# EAGLE board UTN-Clase-Electronica02_003-CottierSolange-C3 (EAGLE 9.7.0)

Size 101.22 x 87.79 mm. Coordinates in mm from the lower left corner, seen from the top.
Outline: 0,0 101.22,0 101.22,87.78 0,87.78 0,0
Copper layers (1*16): Top 0.035mm / dielectric 1.5mm / Bottom 0.035mm
Design rules "default": minimum track width 6mil, minimum drill 0.35mm, track to track 6mil, track to pad 6mil, pad to pad 6mil, via to via 6mil, smd to smd 6mil, copper to edge 40mil, drill to drill 6mil, minimum pad ring 10mil, minimum via ring 8mil, stop-mask expansion 4mil, vias tented up to drill 0mil, thermal gap 10mil

## Footprints (pad centres in the part's own frame; a part is rotated, then mirrored left to right if it is on the bottom)
BATTERY-GENERIC = drill 1.118 pad 3.15 octagon: + 2.54,0; - -2.54,0
LEDRD254W60D565H860B = drill 0.981 pad 1.581: 1 -1.27,0; 2 1.27,0
1X02 = drill 1.016 long: 1 -1.27,0; 2 1.27,0
RESAD1016W63L850D250B = drill 0.83 pad 1.43: 1 -5.08,0; 2 5.08,0
GL5528 = drill 0.8 pad 1.4: 1 -1.702,0; 2 1.702,0
SWITCH-SPDT-PTH-8.5X3.7MM = drill 1.016 pad 1.88: 1 -2.54,0; 2 0,0; 3 2.54,0
SWITCH-MOMENTARY-PTH-6.5MM = drill 1.016 pad 1.88: 1 -3.251,2.261; 2 3.251,2.261; 3 -3.251,-2.261; 4 3.251,-2.261

## Placement (x,y rotation side)
BAT1  9V  [BATTERY-GENERIC]  27.25,8.26 180 top
D1  RED  [LEDRD254W60D565H860B]  44.14,71.5 90 top
L1  LIGHTBULB  [1X02]  5.79,53.89 0 top
R1  1k  [RESAD1016W63L850D250B]  59.8,42.15 270 top
R2  PHOTOCELL_GL5528  [GL5528]  94.24,82.07 270 top
S1  TOGGLE  [SWITCH-SPDT-PTH-8.5X3.7MM]  80.93,55.07 270 top
S2  SWITCH_MOMENTARY  [SWITCH-MOMENTARY-PTH-6.5MM]  8.92,37.46 90 top

## Library data of the parts
BAT1 L1 R1 R2 S1 S2 = Tinkercad
D1 = Tinkercad; CATEGORY: Opto-Electronic; SUB-CATEGORY: LED; VALUE: LED_RED

## Nets
BAT1+: BAT1.+ R1.2 R2.2 S2.1
BAT1-: BAT1.- D1.2 L1.2
S1_O: R2.1 S1.1
S1_P: D1.1 S1.2
S1_S: R1.1 S1.3
S2_3: L1.1 S2.3

## Tracks (layer width: path | path; a pad name or v marks a point on that pad's centre or on a via)
BAT1+  (3 unrouted)
BAT1-  (2 unrouted)
S1_O  (1 unrouted)
S1_P  (1 unrouted)
S1_S  (1 unrouted)
S2_3  (1 unrouted)